# EAGLE board StencilPCB (EAGLE 7.7.0)

Size 100 x 80 mm. Coordinates in mm from the lower left corner, seen from the top.
Outline: 0,0 0,80 100,80 100,0 0,0
Copper layers (1*16): Top 0.035mm / dielectric 1.5mm / Bottom 0.035mm
Design rules "default": minimum track width 10mil, minimum drill 24mil, track to track 8mil, track to pad 8mil, pad to pad 8mil, via to via 8mil, smd to smd 8mil, copper to edge 40mil, drill to drill 8mil, minimum pad ring 10mil, minimum via ring 8mil, stop-mask expansion 4mil, vias tented up to drill 0mil, thermal gap 10mil

## Footprints (pad centres in the part's own frame; a part is rotated, then mirrored left to right if it is on the bottom)
DD-3 = smd 1.27 x 3.937: GND -2.54,-6.35; IN 2.54,-6.35; OUT 0,-6.35
DD-5 = smd 0.711 x 3.632: 1 -3.404,-6.261; 2 -1.702,-6.261; 3 0,-6.261; 4 1.702,-6.261; 5 3.404,-6.261
QFN-24 = smd 0.75 x 0.2: 1 -2.1,1.35; 2 -2.1,0.85; 3 -2.1,0.35; 4 -2.1,-0.15; 5 -2.1,-0.65; 6 -2.1,-1.15; 13 2.1,-1.15; 14 2.1,-0.65; 15 2.1,-0.15; 16 2.1,0.35; 17 2.1,0.85; 18 2.1,1.35 | smd 0.2 x 0.75: 7 -1.35,-2.1; 8 -0.85,-2.1; 9 -0.35,-2.1; 10 0.15,-2.1; 11 0.65,-2.1; 12 1.15,-2.1; 19 1.25,2.1; 20 0.65,2.1; 21 0.15,2.1; 22 -0.35,2.1; 23 -0.85,2.1; 24 -1.35,2.1
QFN_64 = smd 0.711 x 0.305: 1 -4.445,3.75; 2 -4.445,3.25; 3 -4.445,2.75; 4 -4.445,2.25; 5 -4.445,1.75; 6 -4.445,1.25; 7 -4.445,0.75; 8 -4.445,0.25; 9 -4.445,-0.25; 10 -4.445,-0.75; 11 -4.445,-1.25; 12 -4.445,-1.75; 13 -4.445,-2.25; 14 -4.445,-2.75; 15 -4.445,-3.25; 16 -4.445,-3.75; 33 4.445,-3.75; 34 4.445,-3.25; 35 4.445,-2.75; 36 4.445,-2.25; 37 4.445,-1.75; 38 4.445,-1.25; 39 4.445,-0.75; 40 4.445,-0.25; 41 4.445,0.25; 42 4.445,0.75; 43 4.445,1.25; 44 4.445,1.75; 45 4.445,2.25; 46 4.445,2.75; 47 4.445,3.25; 48 4.445,3.75 | smd 0.305 x 0.711: 17 -3.75,-4.445; 18 -3.25,-4.445; 19 -2.75,-4.445; 20 -2.25,-4.445; 21 -1.75,-4.445; 22 -1.25,-4.445; 23 -0.75,-4.445; 24 -0.25,-4.445; 25 0.25,-4.445; 26 0.75,-4.445; 27 1.25,-4.445; 28 1.75,-4.445; 29 2.25,-4.445; 30 2.75,-4.445; 31 3.25,-4.445; 32 3.75,-4.445; 49 3.75,4.445; 50 3.25,4.445; 51 2.75,4.445; 52 2.25,4.445; 53 1.75,4.445; 54 1.25,4.445; 55 0.75,4.445; 56 0.25,4.445; 57 -0.25,4.445; 58 -0.75,4.445; 59 -1.25,4.445; 60 -1.75,4.445; 61 -2.25,4.445; 62 -2.75,4.445; 63 -3.25,4.445; 64 -3.75,4.445 | smd 4.242 x 4.242: 65 0,0
ST-3 = smd 0.61 x 1.994: GND 0,-2.758; IN -2.299,-2.758; OUT 2.299,-2.758 | smd 3.15 x 1.994: TAB 0,2.758
TSSOP-24 = smd 1.4 x 0.305: 1 -0.65,-0.025; 2 -0.65,-0.65; 3 -0.65,-1.3; 4 -0.65,-1.951; 5 -0.65,-2.601; 6 -0.65,-3.251; 7 -0.65,-3.901; 8 -0.65,-4.552; 9 -0.65,-5.202; 10 -0.65,-5.852; 11 -0.65,-6.502; 12 -0.65,-7.153; 13 4.999,-7.127; 14 4.999,-6.477; 15 4.999,-5.827; 16 4.999,-5.177; 17 4.999,-4.526; 18 4.999,-3.876; 19 4.999,-3.226; 20 4.999,-2.576; 21 4.999,-1.925; 22 4.999,-1.275; 23 4.999,-0.625; 24 4.999,0.025
SOT143 = smd 0.76 x 0.55: 1 -0.82,-0.93 | smd 0.5 x 0.55: 2 0.76,-0.93; 3 0.79,0.94; 4 -0.94,0.94
TSSOP-24-THIN-PADS = smd 0.762 x 0.305: 1 -0.65,-0.351; 2 -0.65,-0.975; 3 -0.65,-1.626; 4 -0.65,-2.276; 5 -0.65,-2.926; 6 -0.65,-3.576; 7 -0.65,-4.227; 8 -0.65,-4.877; 9 -0.65,-5.527; 10 -0.65,-6.177; 11 -0.65,-6.828; 12 -0.65,-7.478; 13 4.999,-7.452; 14 4.999,-6.802; 15 4.999,-6.152; 16 4.999,-5.502; 17 4.999,-4.851; 18 4.999,-4.201; 19 4.999,-3.551; 20 4.999,-2.901; 21 4.999,-2.25; 22 4.999,-1.6; 23 4.999,-0.95; 24 4.999,-0.3
TQFN-20 = smd 0.35 x 0.95: BIAS 0.33,-0.72; CS 1.63,3.95; DGND 0.33,3.95; FORCE+ 2.93,-0.72; ISENSOR 2.28,-0.72; REFIN+ 0.98,-0.72; REFIN- 1.63,-0.72; SCLK 2.28,3.95; SD0 0.98,3.95; SDI 2.93,3.95 | smd 0.95 x 0.35: DRDY -0.694,1.625; DVDD -0.694,0.976; FORCE2 3.976,0.326; FORCE- 3.976,2.276; GND1 -0.694,2.925; GND2 3.976,2.925; NC -0.694,2.276; RTDIN+ 3.976,0.976; RTDIN- 3.976,1.625; VDD -0.694,0.326
QFN50P500X500X90-33N = smd 0.85 x 0.3: 1 -2.45,1.75; 2 -2.45,1.25; 3 -2.45,0.75; 4 -2.45,0.25; 5 -2.45,-0.25; 6 -2.45,-0.75; 7 -2.45,-1.25; 8 -2.45,-1.75; 17 2.45,-1.75; 18 2.45,-1.25; 19 2.45,-0.75; 20 2.45,-0.25; 21 2.45,0.25; 22 2.45,0.75; 23 2.45,1.25; 24 2.45,1.75 | smd 0.3 x 0.85: 9 -1.75,-2.45; 10 -1.25,-2.45; 11 -0.75,-2.45; 12 -0.25,-2.45; 13 0.25,-2.45; 14 0.75,-2.45; 15 1.25,-2.45; 16 1.75,-2.45; 25 1.75,2.45; 26 1.25,2.45; 27 0.75,2.45; 28 0.25,2.45; 29 -0.25,2.45; 30 -0.75,2.45; 31 -1.25,2.45; 32 -1.75,2.45 | smd 3.6 x 3.6: 33 0,0
SOIC127P600X175-16N = smd 2.057 x 0.61: 1 -4.801,8.89; 2 -4.801,7.62; 3 -4.801,6.35; 4 -4.801,5.08; 5 -4.801,3.81; 6 -4.801,2.54; 7 -4.801,1.27; 8 -4.801,0; 9 0,0; 10 0,1.27; 11 0,2.54; 12 0,3.81; 13 0,5.08; 14 0,6.35; 15 0,7.62; 16 0,8.89
MSOP-10_MS-L = smd 1.092 x 0.279: 1 -2.134,1.001; 2 -2.134,0.5; 3 -2.134,0; 4 -2.134,-0.5; 5 -2.134,-1.001; 6 2.134,-1.001; 7 2.134,-0.5; 8 2.134,0; 9 2.134,0.5; 10 2.134,1.001
TQFN-44_7X7-M = smd 1.016 x 0.305: 1 -3.454,2.5; 2 -3.454,2; 3 -3.454,1.5; 4 -3.454,1; 5 -3.454,0.5; 6 -3.454,0; 7 -3.454,-0.5; 8 -3.454,-1; 9 -3.454,-1.5; 10 -3.454,-2; 11 -3.454,-2.5; 23 3.454,-2.5; 24 3.454,-2; 25 3.454,-1.5; 26 3.454,-1; 27 3.454,-0.5; 28 3.454,0; 29 3.454,0.5; 30 3.454,1; 31 3.454,1.5; 32 3.454,2; 33 3.454,2.5 | smd 0.305 x 1.016: 12 -2.5,-3.454; 13 -2,-3.454; 14 -1.5,-3.454; 15 -1,-3.454; 16 -0.5,-3.454; 17 0,-3.454; 18 0.5,-3.454; 19 1,-3.454; 20 1.5,-3.454; 21 2,-3.454; 22 2.5,-3.454; 34 2.5,3.454; 35 2,3.454; 36 1.5,3.454; 37 1,3.454; 38 0.5,3.454; 39 0,3.454; 40 -0.5,3.454; 41 -1,3.454; 42 -1.5,3.454; 43 -2,3.454; 44 -2.5,3.454 | smd 5.207 x 5.207: 45 0,0
TQFN-44_7X7-L = smd 0.813 x 0.305: 1 -3.353,2.5; 2 -3.353,2; 3 -3.353,1.5; 4 -3.353,1; 5 -3.353,0.5; 6 -3.353,0; 7 -3.353,-0.5; 8 -3.353,-1; 9 -3.353,-1.5; 10 -3.353,-2; 11 -3.353,-2.5; 23 3.353,-2.5; 24 3.353,-2; 25 3.353,-1.5; 26 3.353,-1; 27 3.353,-0.5; 28 3.353,0; 29 3.353,0.5; 30 3.353,1; 31 3.353,1.5; 32 3.353,2; 33 3.353,2.5 | smd 0.305 x 0.813: 12 -2.5,-3.353; 13 -2,-3.353; 14 -1.5,-3.353; 15 -1,-3.353; 16 -0.5,-3.353; 17 0,-3.353; 18 0.5,-3.353; 19 1,-3.353; 20 1.5,-3.353; 21 2,-3.353; 22 2.5,-3.353; 34 2.5,3.353; 35 2,3.353; 36 1.5,3.353; 37 1,3.353; 38 0.5,3.353; 39 0,3.353; 40 -0.5,3.353; 41 -1,3.353; 42 -1.5,3.353; 43 -2,3.353; 44 -2.5,3.353 | smd 5.207 x 5.207: 45 0,0

## Placement (x,y rotation side)
E$1  [DD-3]  7.62,67.31 0 top
E$2  [DD-5]  21.59,67.31 0 top
E$3  QFN-24  [QFN-24]  13.97,43.18 0 top
E$4  QFN-64  [QFN_64]  49.53,67.31 0 top
E$5  ST-3  [ST-3]  64.77,69.85 0 top
E$6  TSSOP-24  [TSSOP-24]  76.2,72.39 0 top
E$7  SOT-143  [SOT143]  31.75,53.34 0 top
E$8  TSSOP-24-THIN-PADS  [TSSOP-24-THIN-PADS]  76.2,60.96 0 top
E$9  TQFN-20  [TQFN-20]  3.81,41.91 0 top
E$10  QFN-50-MC34717  [QFN50P500X500X90-33N]  24.13,44.45 0 top
E$11  SOIC-16-PCA9670  [SOIC127P600X175-16N]  46.99,38.1 0 top
E$12  MSOP-10-SP6134  [MSOP-10_MS-L]  45.72,54.61 0 top
E$13  [TQFN-44_7X7-M]  57.15,54.61 0 top
E$14  [TQFN-44_7X7-L]  66.04,54.61 0 top

## Library data of the parts
E$1-E$8 = JoseAriasEagleLib
E$9 = MAX17504
E$10 = MC34717EP
E$11 = PCA9670
E$12 = SP6134
E$13 E$14 = SistemaCendit11713